# Altium PCB SensorLDR_PCB.PcbDoc
Units mm, origin at the board's own origin, x right, y up, seen from the top; angles counter-clockwise.
Board outline 107.06 x 38.99 mm, 2 copper layers (Top Layer, Bottom Layer); 19 components, 11 nets, 54 pads, 0 vias.
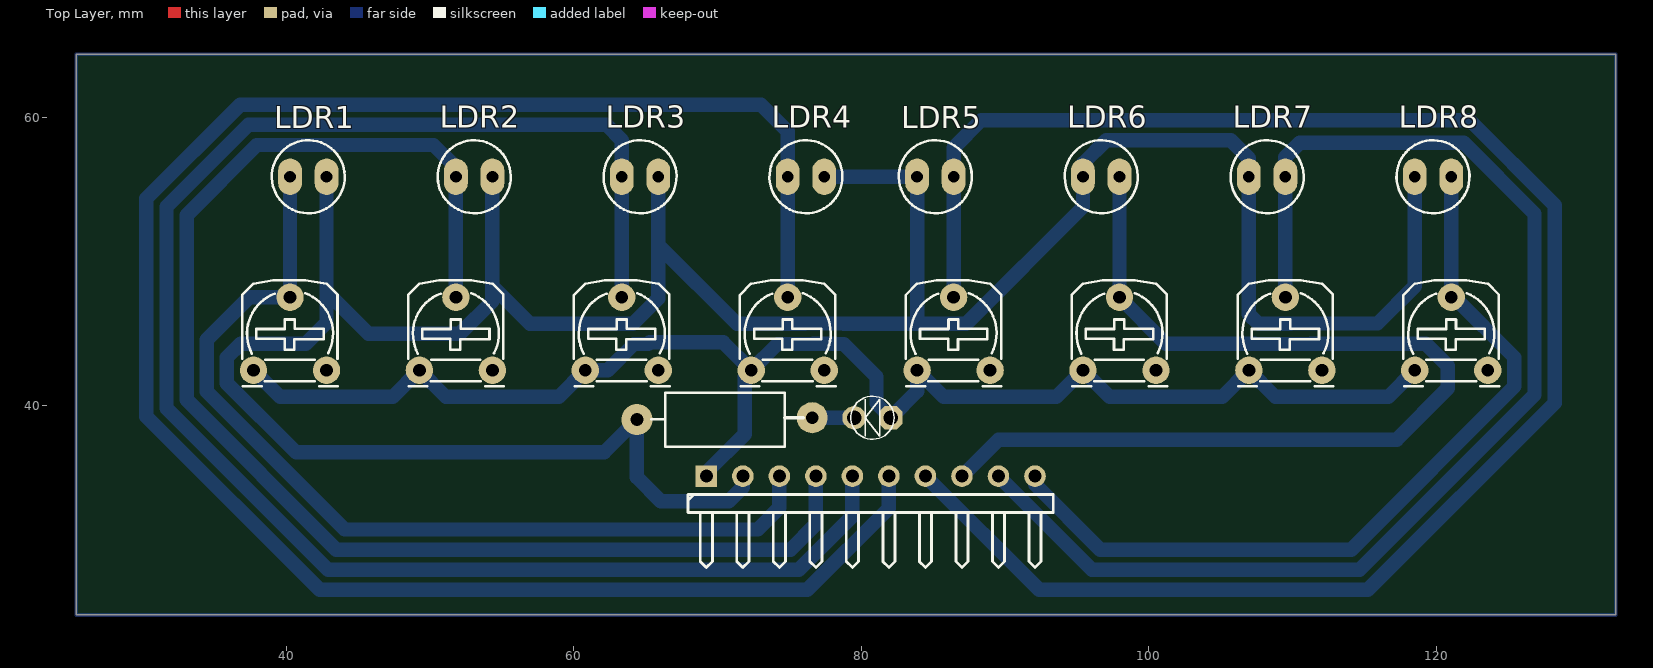
[diagram p0: Top Layer view]
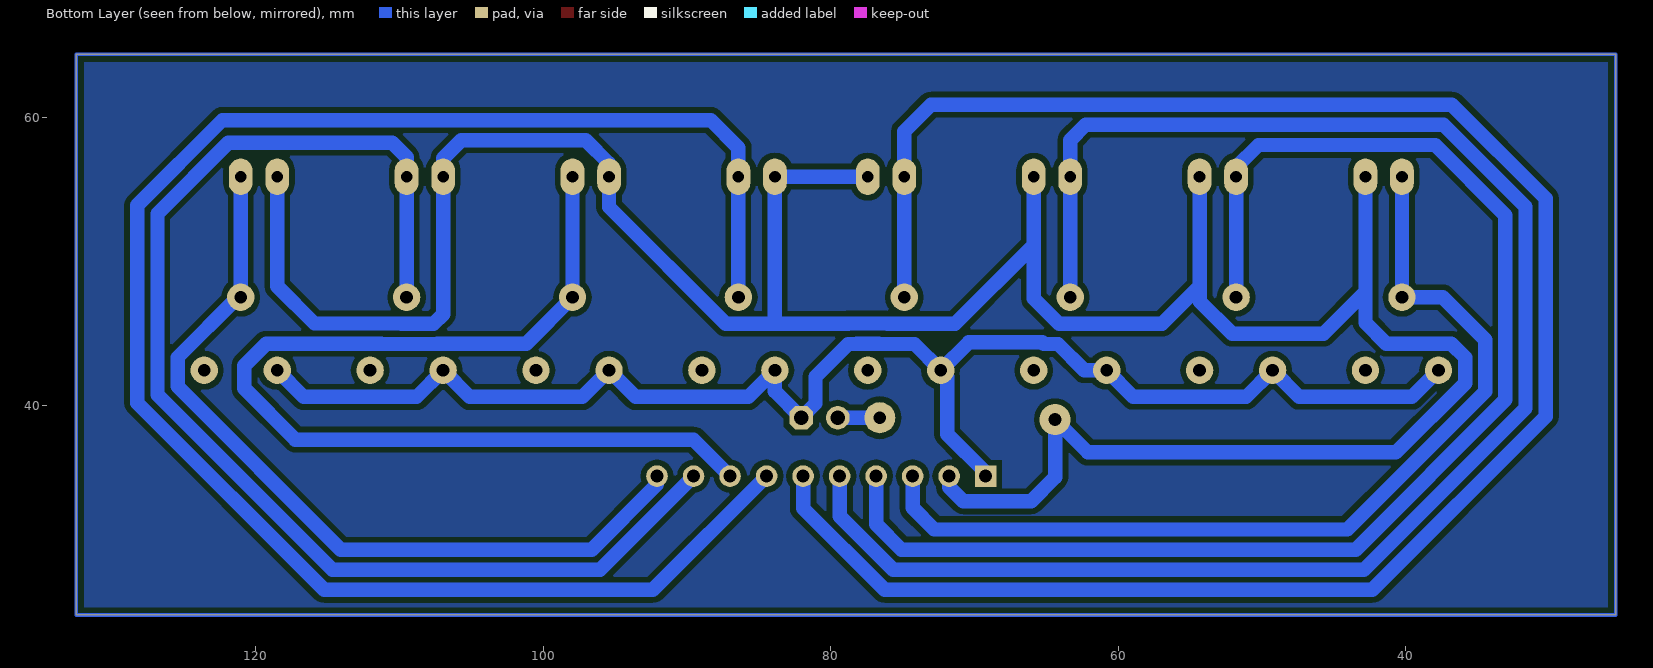
[diagram p1: Bottom Layer view, seen from below]
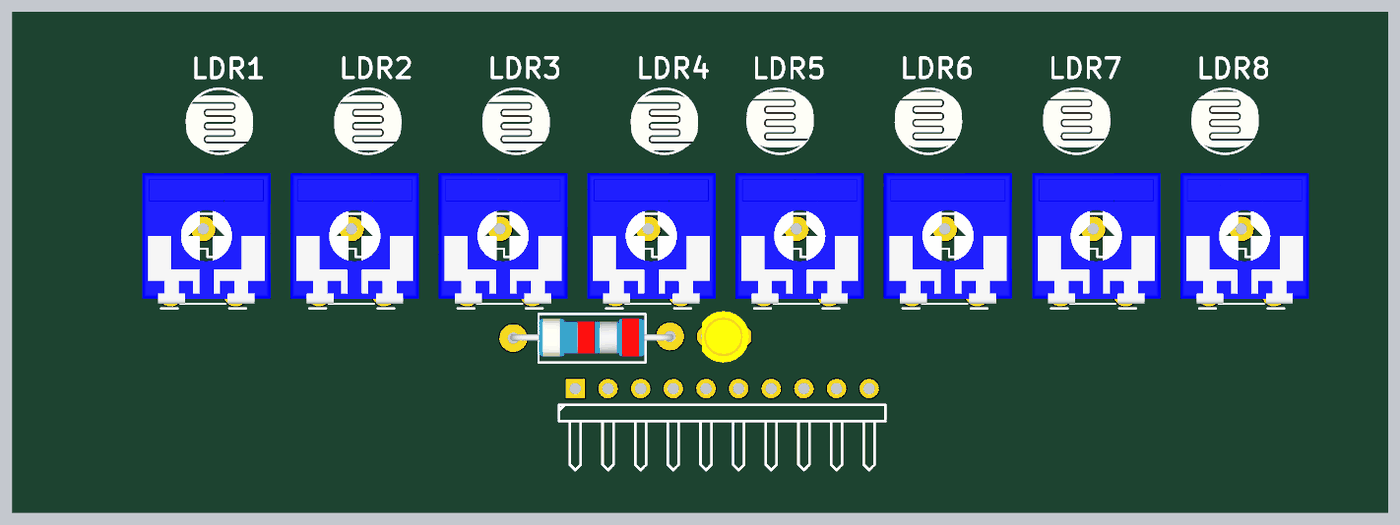
[diagram p2: 3D render of the assembled board from above, using the file's embedded part models]

## Layer stack, top to bottom
Top Solder: solder mask 0.0102, Solder Resist, Dk 3.5
Top Layer: signal copper 0.0356
Dielectric 1: dielectric 0.32, FR-4, Dk 4.8
Bottom Layer: signal copper 0.0356
Bottom Solder: solder mask 0.0102, Solder Resist, Dk 3.5

## Board outline
25.4,25.4 25.4,64.389 132.461,64.389 132.461,25.4

## Design rules (kind name [scope] priority, off if disabled: settings)
Clearance [All] p1: gap=0.4 ignorepadtopadclearanceinfootprint=FALSE
DiffPairsRouting [All] p1: maxlimit=3 minlimit=3 mostfreqgap=3 toplayer_minwidth=0.381 toplayer_maxwidth=0.381 toplayer_prefwidth=0.381 bottomlayer_minwidth=0.381 bottomlayer_maxwidth=0.381 bottomlayer_prefwidth=0.381 maxuncoupledlength=12.7
PolygonConnect [All] p1: connectstyle=Relief reliefconductorwidth=0.254 reliefentries=4 polygonreliefangle="90 Angle" airgapwidth=0.254
RoutingLayers [All] p1: top layer_v5=FALSE bottom layer_v5=TRUE
RoutingVias [All] p1: holewidth=0.711 width=1.27 viastyle="Through Hole" minholewidth=0.711 minwidth=1.27 maxholewidth=0.711 maxwidth=1.27
SolderMaskExpansion [All] p1: expansion=0.102
Width Others [All] p1: maxlimit=1 minlimit=1 preferedwidth=1
Width VCC [InNet('VCC')] p2: maxlimit=1 minlimit=1 preferedwidth=1
Width GND [InNet('GND')] p3: maxlimit=1 minlimit=1 preferedwidth=1
28 further rules are at their usual default settings.

## Classes and differential pairs
component class SensorLDR: LDR1 LDR2 LDR3 LDR4 LDR5 LDR6 LDR7 LDR8

## Components (designator, comment, footprint, x,y, rotation, side; value= is the part's Value field where it differs from the comment)
LDR1 "LDR" CDS 42.799,55.88 r180 top
LDR2 "LDR" CDS 54.338,55.88 r180 top
LDR3 "LDR" CDS 65.877,55.88 r180 top
LDR4 "LDR" CDS 77.416,55.88 r180 top
LDR5 "LDR" CDS 83.874,55.88 r0 top
LDR6 "LDR" CDS 95.413,55.88 r0 top
LDR7 "LDR" CDS 106.952,55.88 r0 top
LDR8 "LDR" CDS 118.491,55.88 r0 top
LED? "LED" LED-3MM-YELLOW 82.042,39.116 r180 top value="LED 3 ly Single Colour"
P? "Header 10H" HDR1X10H 69.215,35.052 r0 top
R_Led "Res" RES-1/2W 70.993,38.989 r180 top
VR1 "50K" VR-S2 37.719,42.418 r0 top value="Volume 50k"
VR2 "50K" VR-S2 49.258,42.418 r0 top value="Volume 50k"
VR3 "50K" VR-S2 60.797,42.418 r0 top value="Volume 50k"
VR4 "50K" VR-S2 72.336,42.418 r0 top value="Volume 50k"
VR5 "50K" VR-S2 83.874,42.418 r0 top value="Volume 50k"
VR6 "50K" VR-S2 95.413,42.418 r0 top value="Volume 50k"
VR7 "50K" VR-S2 106.952,42.418 r0 top value="Volume 50k"
VR8 "50K" VR-S2 118.491,42.418 r0 top value="Volume 50k"

## Footprints (in the part's own frame and the unit in brackets; to place one, negate y for a bottom-side part, rotate by r counter-clockwise, add the part's x,y. Pads: shape width x height; smd on the part's side, far side on the other; paste and mask are expansions set on the pad)
CDS [mil] "QUANG TRO"
  oval 65x100 hole 32: 1(0,0) 2(100,0)
  silkscreen extent -50,-100 150,100, body extent -53,-80 153,89, height 138
HDR1X10H [mm] "Connector; Header; 10 Position; Right Angle"
  rect 1.5x1.5 hole 0.9: 1(0,0)
  round 1.5 hole 0.9: 2(2.54,0) 3(5.08,0) 4(7.62,0) 5(10.16,0) 6(12.7,0) 7(15.24,0) 8(17.78,0) 9(20.32,0) 10(22.86,0)
  silkscreen extent -1.27,-6.35 24.13,-1.27
LED-3MM-YELLOW [mil]
  oct 65x65 hole 40: 1(0,0)
  round 65 hole 40: 2(100,0)
  silkscreen extent -9,-59 109,59, body extent -27,-77 117,80, height 181
RES-1/2W [mil]
  round 85 hole 35: 1(-220,-5) 2(260,0)
  silkscreen extent -195,-74 221,75, body extent -230,-60 270,56, height 121
VR-S2 [mil] "Resistor Variable"
  round 75 hole 35: 1(0,0) 2(100,200) 3(200,0)
  silkscreen extent -31,-44 231,246, body extent -87,-30 307,372, height 165

## Part data
LDR1 LDR2 LDR3 LDR4 LDR5 LDR6 LDR7 LDR8: "Quang Tro"
LED?: "LED Single colour Green and Red"
P?: "Header, 10-Pin, Right Angle", LatestRevisionDate=17-Jul-2002, LatestRevisionNote="Re-released for DXP Platform.", Publisher="Altium Limited"
R_Led: Manufacturer="Generic Components", Class=Passive, Published=08/06/2000, Publisher="Altium Hobart Technology Centre", SubClass=R
VR1 VR2 VR3 VR4 VR5 VR6 VR7 VR8: library part VR-S, "Var Resistor"

## Nets (pads, with @x,y where several pads share a name; then routed paths per layer and width w, separated by ;. In a path a pad name is that pad's centre, name@x,y a point inside that pad or via, vN(x,y) a via of type N, cw(c..) or ccw(c..) an arc to the next point about the centre after c; other vN are vias at no path point)
GND: LDR1.1 LDR2.1 LDR3.1 LDR4.1 LDR5.1 LDR6.1 LDR7.1 LDR8.1 P?.2 R_Led.2 | length 207.8
  Bottom Layer w1: LDR1.1 42.799,47.879 ; LDR2.1 54.338,48.26 ; LDR3.1 65.877,51.117 ; P?.2 71.755,34.29 70.783,33.318 66.04,33.318 64.389,34.969 R_Led.2 62.103,36.703 40.686,36.703 35.866,41.522 35.866,43.309 36.83,44.272 41.351,44.272 42.799,45.72 42.799,47.879 ; LDR4.1 LDR5.1 83.874,45.645 ; LDR8.1 118.491,48.26 115.902,45.671 109.892,45.671 109.865,45.644 107.62,45.644 106.952,46.311 LDR7.1 106.952,57.157 105.689,58.42 97.028,58.42 95.413,56.805 LDR6.1 95.413,53.772 87.287,45.645 83.874,45.645 ; 42.799,47.879 45.72,44.958 52.07,44.958 54.338,47.226 54.338,48.26 ; 54.338,48.26 56.954,45.644 64.11,45.644 65.877,47.411 65.877,51.117 ; 65.877,51.117 71.349,45.645 76.043,45.645 76.068,45.671 78.763,45.671 78.788,45.645 83.874,45.645
NetLED?_2: LED?.2 R_Led.1 | length 2.9
  Bottom Layer w1: R_Led.1 LED?.2
S1: LDR1.2 P?.3 VR1.2 | length 65.6
  Bottom Layer w1: LDR1.2 VR1.2 37.414,47.498 34.466,44.55 34.466,40.942 44.065,31.344 72.786,31.344 74.295,32.853 P?.3
S2: LDR2.2 P?.4 VR2.2 | length 95.4
  Bottom Layer w1: VR2.2 LDR2.2 51.798,56.533 50.241,58.09 37.948,58.09 33.066,53.208 33.066,40.362 43.485,29.944 75.069,29.944 76.835,31.71 P?.4
S3: LDR3.2 P?.5 VR3.2 | length 116.1
  Bottom Layer w1: VR3.2 LDR3.2 63.337,58.42 62.267,59.49 37.368,59.49 31.666,53.788 31.666,39.782 42.905,28.544 75.649,28.544 79.375,32.27 P?.5
S4: LDR4.2 P?.6 VR4.2 | length 136
  Bottom Layer w1: VR4.2 LDR4.2 74.876,59.03 73.015,60.89 36.789,60.89 30.266,54.368 30.266,39.203 42.325,27.144 76.229,27.144 81.915,32.83 P?.6
S5: LDR5.2 P?.7 VR5.2 | length 121.6
  Bottom Layer w1: P?.7 92.363,27.144 115.23,27.144 128.224,40.138 128.224,53.894 122.298,59.82 88.348,59.82 86.414,57.887 LDR5.2 VR5.2
S6: LDR6.2 P?.8 VR6.2 | length 71.1
  Bottom Layer w1: P?.8 89.535,37.592 117.226,37.592 120.792,41.157 120.792,42.737 119.258,44.271 111.265,44.271 111.238,44.244 107.367,44.244 107.34,44.271 101.181,44.271 VR6.2 LDR6.2
S7: LDR7.2 P?.9 VR7.2 | length 87.2
  Bottom Layer w1: P?.9 96.043,28.544 114.65,28.544 126.824,40.718 126.824,53.315 121.896,58.242 110.49,58.242 109.492,57.244 LDR7.2 VR7.2
S8: LDR8.2 P?.10 VR8.2 | length 57
  Bottom Layer w1: P?.10 92.075,34.492 96.623,29.944 114.07,29.944 125.424,41.297 125.424,43.307 121.233,47.498 VR8.2 LDR8.2
VCC: LED?.1 P?.1 VR1.1 VR2.1 VR3.1 VR4.1 VR5.1 VR6.1 VR7.1 VR8.1 | length 104.9
  Bottom Layer w1: VR1.1 39.573,40.564 47.404,40.564 VR2.1 51.112,40.564 58.943,40.564 VR3.1 62.357,42.418 64.184,44.245 65.164,44.245 65.292,44.374 70.38,44.374 VR4.1 ; P?.1 69.215,35.306 71.882,37.973 71.882,41.964 VR4.1 ; VR8.1 116.637,40.564 108.806,40.564 VR7.1 105.098,40.564 97.267,40.564 VR6.1 93.559,40.564 85.729,40.564 VR5.1 83.874,40.948 LED?.1 81.051,40.107 81.051,41.961 78.767,44.245 78.208,44.245 78.183,44.271 76.648,44.271 76.623,44.245 74.163,44.245 VR4.1
pads on no net: VR1.3 VR2.3 VR3.3 VR4.3 VR5.3 VR6.3 VR7.3 VR8.3
copper on no net: | length 292.1
  Bottom Layer w0.254: 25.4,25.4 25.4,64.389 132.461,64.389 132.461,25.4 25.4,25.4

## Polygon pours and split planes (outlines as drawn)
no net on Bottom Layer (solid, pour order 12): 25.4,64.389 25.4,25.4 132.461,25.4 132.461,64.389
no net on Bottom Layer "Bottom Layer-No Net" (solid, pour order 10): 25.4,63.627